# Altium PCB cangps_micro.PcbDoc
Units mm, origin at the board's own origin, x right, y up, seen from the top; angles counter-clockwise.
Board outline 13 x 33.5 mm, 2 copper layers (Top Layer, Bottom Layer); 21 components, 23 nets, 114 pads, 65 vias.
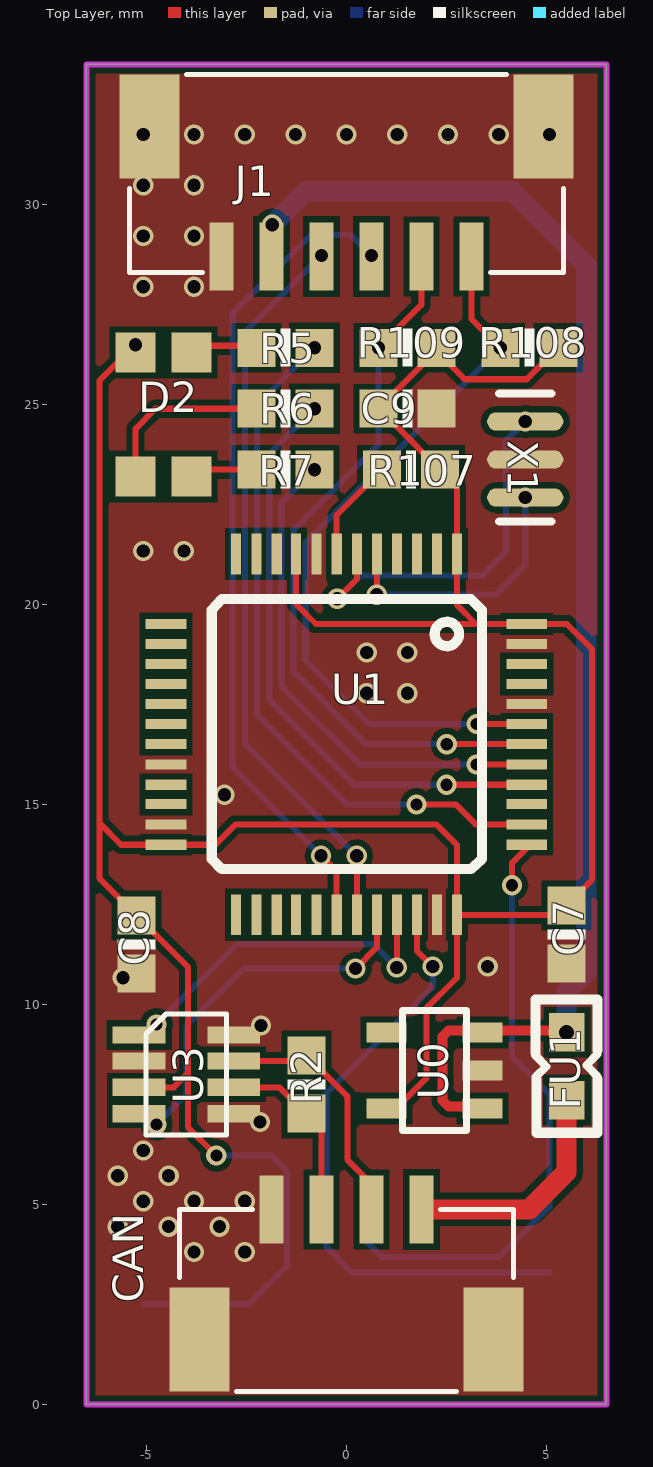
[diagram p0: Top Layer view]
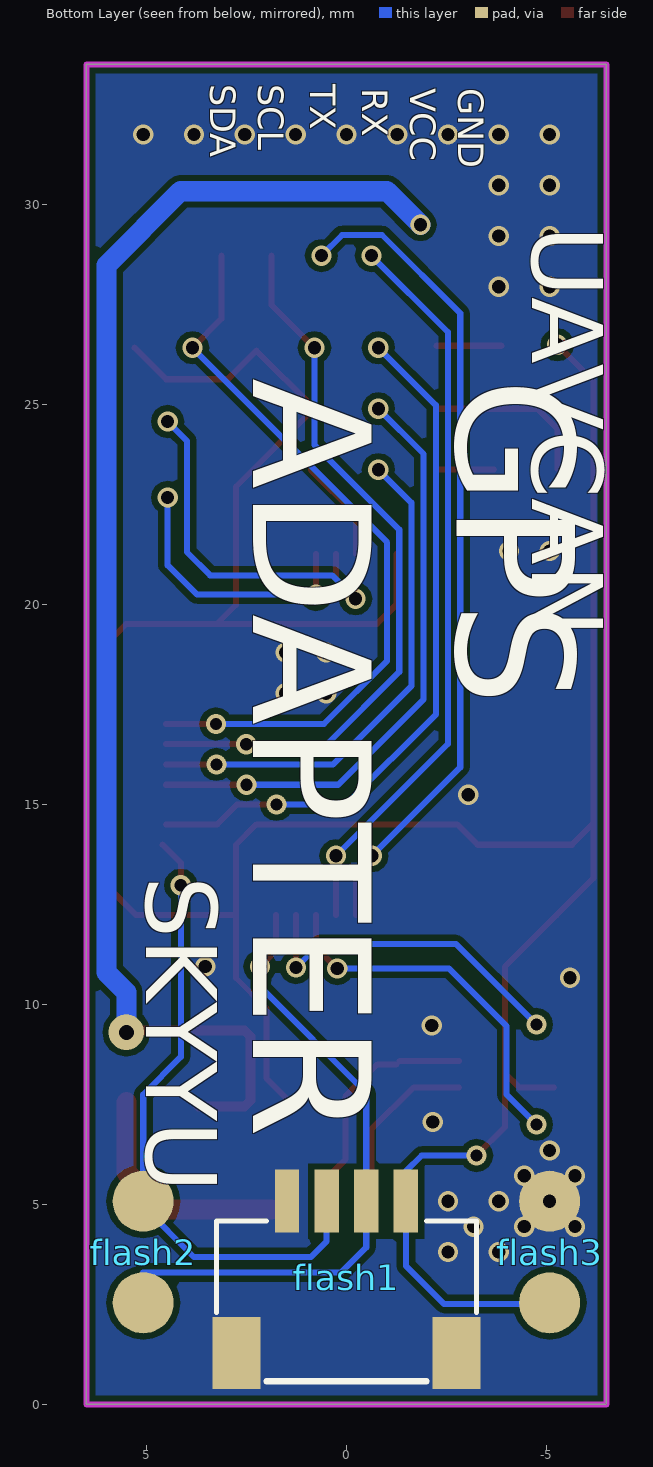
[diagram p1: Bottom Layer view, seen from below]
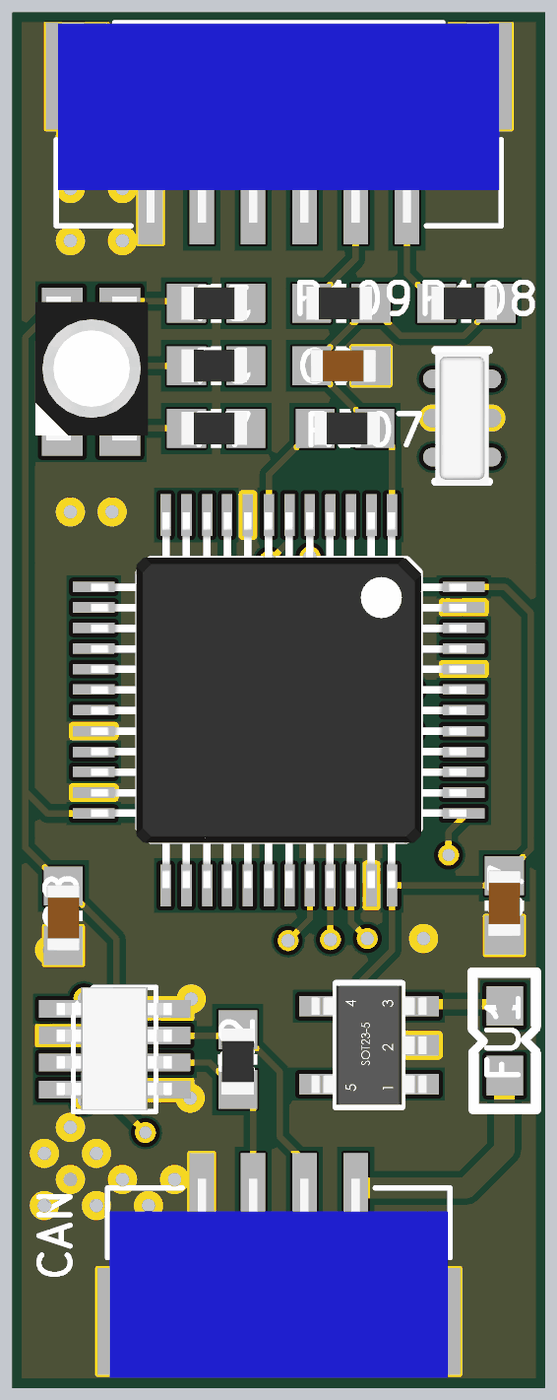
[diagram p2: 3D render of the assembled board from above, using the file's embedded part models]

## Layer stack, top to bottom
Top Solder: solder mask 0.0102, Solder Resist, Dk 3.5
Top Layer: signal copper 0.0356
Dielectric 1: dielectric 0.32, FR-4, Dk 4.8
Bottom Layer: signal copper 0.0356
Bottom Solder: solder mask 0.0102, Solder Resist, Dk 3.5

## Board outline
-6.5,0 6.5,0 6.5,33.5 -6.5,33.5

## Design rules (kind name [scope] priority, off if disabled: settings)
Clearance [All] p1: gap=0.152
ComponentClearance [All] p1 off: gap=0.254 collisioncheckmode=3 verticalgap=0.254 showdistances=FALSE
PolygonConnect [All] p1: connectstyle=Direct reliefconductorwidth=0.065 reliefentries=4 polygonreliefangle="90 Angle" airgapwidth=0
RoutingVias [All] p1: holewidth=0.711 width=1.27 viastyle="Through Hole" minholewidth=0.711 minwidth=1.27 maxholewidth=0.711 maxwidth=1.27
SolderMaskExpansion [All] p1: expansion=0.102
Width [All] p1: maxlimit=0.762 minlimit=0.152 preferedwidth=0.254
29 further rules are at their usual default settings.

## Components (designator, comment, footprint, x,y, rotation, side; value= is the part's Value field where it differs from the comment)
C7 "0.1uF" C0603 5.5,11.75 r90 top
C8 "0.1uF" C0603 -5.25,11.5 r270 top
C9 "0.1uF" C0603 1.524,24.892 r0 top
CAN "J-GH1.25-04P" SM04B-GHS-TB 0,3.75 r180 top
D2 "RGB_3528" RGB_3528 -4.575,24.7 r270 top
flash1 "J-SH1.0-04P" SM04B-SRSS-TB 0,5.08 r0 bottom
flash2 "PAD2" PAD2_2.54 5.08,3.81 r270 bottom
flash3 "PAD2" PAD2_2.54 -5.08,3.81 r270 bottom
FU1 "500MA" L0603 5.512,8.458 r270 top
J1 "J-GH1.25-06P" SM06B-GHS-TB 0,29.825 r0 top
R2 "120" R0603 -1,8 r270 top
R5 "10k" R0603 -1.524,26.416 r180 top
R6 "10k" R0603 -1.524,24.892 r180 top
R7 "10k" R0603 -1.524,23.368 r180 top
R107 "10K" R0603 1.614,23.368 r0 top
R108 "10K" R0603 4.572,26.416 r180 top
R109 "10K" R0603 1.524,26.416 r180 top
U0 "MIC5205" SOT23-5 2.2,8.35 r180 top
U1 "STM32F103C8Tx" LQFP48 0,16.75 r270 top
U3 "MAX3051" SOT23-8 -4,8.25 r0 top
X1 "CSTCE8M" XTAL-CSTCE 4.47,23.622 r90 top

## Footprints (in the part's own frame and the unit in brackets; to place one, negate y for a bottom-side part, rotate by r counter-clockwise, add the part's x,y. Pads: shape width x height; smd on the part's side, far side on the other; paste and mask are expansions set on the pad)
C0603 [mm]
  rect 0.95x0.95 smd mask+0.051: 1(-0.725,0) 2(0.725,0)
  silkscreen extent -0.13,-0.48 0.13,0.47, body extent -0.75,-0.4 0.85,0.4, height 0.6
L0603 [mil]
  rect 38x35 smd: 1(-33.44,0) 2(33.44,0)
  silkscreen extent -65,-31 66,30, body extent -29,-15 31,15, height 20
LQFP48 [mil]
  rect 40x10 smd: 1(-177.58,108.68) 2(-177.58,89) 3(-177.58,69.31) 4(-177.58,49.63) 5(-177.58,29.94) 6(-177.58,10.26) 7(-177.58,-9.58) 8(-177.58,-29.58) 9(-177.58,-49.58) 10(-177.58,-68.58) 11(-177.58,-88.58) 12(-177.58,-108.58) 25(177.58,-108.58) 26(177.58,-88.58) 27(177.58,-68.58) 28(177.58,-49.58) 29(177.58,-29.58) 30(177.58,-9.58) 31(177.58,10.26) 32(177.58,29.94) 33(177.58,49.63) 34(177.58,69.31) 35(177.58,89) 36(177.58,108.68)
  rect 10x40 smd: 13(-108.68,-177.58) 14(-89,-177.58) 15(-69.31,-177.58) 16(-49.63,-177.58) 17(-29.94,-177.58) 18(-10.26,-177.58) 19(9.58,-177.58) 20(29.58,-177.58) 21(49.58,-177.58) 22(68.58,-177.58) 23(88.58,-177.58) 24(108.58,-177.58) 37(108.58,177.58) 38(88.58,177.58) 39(68.58,177.58) 40(49.58,177.58) 41(29.58,177.58) 42(9.58,177.58) 43(-10.26,177.58) 44(-29.94,177.58) 45(-49.63,177.58) 46(-69.31,177.58) 47(-89,177.58) 48(-108.68,177.58)
  silkscreen extent -133,-133 133,133, body extent -180,-180 180,180, height 64
PAD2_2.54 [mil]
  round 60 smd: 1(50,0) 2(-50,0)
R0603 [mm]
  rect 0.95x0.95 smd mask+0.051: 1(-0.725,0) 2(0.725,0)
  silkscreen extent -0.13,-0.48 0.13,0.47, body extent -0.75,-0.4 0.85,0.4, height 0.4
RGB_3528 [mm]
  rect 1x1 smd: 1(-1.6,-0.7) 2(-1.6,0.7) 3(1.5,0.7) 4(1.5,-0.7)
  body extent -1.88,-1.36 1.62,1.39, height 1.95
SM04B-GHS-TB [mm]
  rect 0.6x1.7 smd mask+0.051: 1(-1.875,-1.125) 2(-0.625,-1.125) 3(0.625,-1.125) 4(1.875,-1.125)
  rect 1.5x2.6 smd mask+0.051: GND(-3.675,2.125) GND(3.675,2.125)
  silkscreen extent -4.18,-1.12 4.17,3.43, body extent -4.13,-1.35 4.13,3.5, height 4.25
SM04B-SRSS-TB [mil]
  rect 24x62 smd mask+2: 1(-58.5,0) 2(-19.5,0) 3(19.5,0) 4(58.5,0)
  rect 47.24x70.87 smd mask+2: GND(-108.27,149.61) GND(108.27,149.61)
  silkscreen extent -128,19 128,177, body extent -118,-18 118,177, height 116
SM06B-GHS-TB [mm]
  rect 0.6x1.7 smd mask+0.051: 1(-3.125,-1.125) 2(-1.875,-1.125) 3(-0.625,-1.125) 4(0.625,-1.125) 5(1.875,-1.125) 6(3.125,-1.125)
  rect 1.5x2.6 smd mask+0.051: GND(-4.925,2.125) GND(4.925,2.125)
  silkscreen extent -5.43,-1.52 5.43,3.43, body extent -5.38,-1.45 5.38,3.4, height 4.25
SOT23-5 [mm]
  rect 1x0.5 smd: 1(-1.2,0.95) 2(-1.2,0) 3(-1.2,-0.95) 4(1.2,-0.95) 5(1.2,0.95)
  silkscreen extent -0.8,-1.5 0.8,1.5, body extent -1.4,-1.45 1.4,1.45, height 1.09
SOT23-8 [mil]
  rect 52x17 smd: 1(-46.63,38.69) 2(-46.63,13.1) 3(-46.63,-12.69) 4(-46.63,-38.69) 5(46.63,-38.69) 6(46.63,-12.69) 7(46.63,13.1) 8(46.63,38.69)
  silkscreen extent -40,-60 40,59, body extent -56,-59 55,59, height 44
XTAL-CSTCE [mil]
  rrect100% 18x75 smd: 1(-37.4,0) 2(0,0) 3(37.4,0)
  silkscreen extent -61,-26 65,26, body extent -63,-26 63,26, height 40

## Part data
C7 C8 C9: library part Capacitor
FU1: library part FU
R2 R5 R6 R7 R107 R108 R109: library part Resistor

## Via types
v1: diameter 0.508, hole 0.33, Top Layer to Bottom Layer, 55 vias
v2: diameter 0.508, hole 0.305, Top Layer to Bottom Layer, 9 vias
v3: diameter 0.889, hole 0.381, Top Layer to Bottom Layer, 1 vias

## Nets (pads, with @x,y where several pads share a name; then routed paths per layer and width w, separated by ;. In a path a pad name is that pad's centre, name@x,y a point inside that pad or via, vN(x,y) a via of type N, cw(c..) or ccw(c..) an arc to the next point about the centre after c; other vN are vias at no path point)
3.3V: C7.2 C8.1 C9.1 D2.1 flash1.1 flash3.1 R107.2 R108.1 R109.1 U0.5 U1.1 U1.9 U1.24 U1.36 U1.48 U3.3 | length 78.9
  Top Layer w0.152: -6.172,14.529 -5.635,13.992 -3.28,13.992 -2.772,14.5 2.25,14.5 2.761,13.989 2.761,10.661 2,9.9 2,8.15 U0.5@1.3,7.45 ; v1(-5.272,26.492) -6.176,25.588 -6.176,13.151 C8.1 -3.962,10.937 -3.962,6.934 v2(-3.251,6.223) ; U3.3 -4.315,7.928 -3.962,8.28 ; U1.9 -1.259,20.009 -0.761,19.511 3.239,19.511 ; U1.36 5.264,12.239 C7.2 6.143,13.118 6.143,18.876 5.508,19.511 3.239,19.511 ; R108.1 4.51,25.629 2.962,25.629 2.249,26.342 0.807,24.9 2.761,22.946 2.761,19.989 3.239,19.511
  Bottom Layer w0.152: flash3.1@-5.055,2.515 -2.438,2.515 -1.486,3.467 -1.486,5.829 -1.88,6.223 v2(-3.251,6.223)
CANH: CAN.2 R2.1 U3.7 | length 5.9
  Top Layer w0.152: U3.7 R2.1@-1.333,8.583 ; R2.1@-1.25,8.5 -0.775,8.5 0.025,7.7 0.025,6.121 0.625,5.522 CAN.2@0.625,5.125
CANL: CAN.3 R2.2 U3.6 | length 4.6
  Top Layer w0.152: U3.6 -1.678,7.928 -0.625,6.875 CAN.3
GND: C7.1 C8.2 C9.2 CAN.4 CAN.GND flash1.4 flash1.GND flash3.2 J1.1 J1.GND U0.2 U1.8 U1.20 U1.23 U1.35 U1.44 U1.47 U3.2 U3.5 U3.8 X1.2
  other v1: -3.81,3.81 -2.54,3.81 -5.715,4.445 -4.445,4.445 -3.175,4.445 -5.08,5.08 -3.81,5.08 -2.54,5.08 -5.715,5.715 -4.445,5.715 -5.08,6.35 -2.159,7.061 -2.134,9.474 -5.588,10.668 3.531,10.947 -3.048,15.24 0.508,17.78 1.524,17.78 0.508,18.796 1.524,18.796 -5.08,21.336 -4.064,21.336 -5.08,27.94 -3.81,27.94 -5.08,29.21 -3.81,29.21 -5.08,30.48 -3.81,30.48 -5.08,31.75 -3.81,31.75 -2.54,31.75 -1.27,31.75 0,31.75 1.27,31.75 2.54,31.75 3.81,31.75 5.08,31.75
NetCAN_1: CAN.1 FU1.2 | length 5.8
  Top Layer w0.508: CAN.1 4.57,4.875 5.5,5.805 FU1.2@5.5,7.551
NetD2_2: D2.2 R5.2 | length 1.6
  Top Layer w0.152: D2.2@-3.872,26.467 R5.2@-2.249,26.467
NetD2_3: D2.3 R7.2 | length 1.4
  Top Layer w0.152: D2.3@-3.693,23.368 R7.2
NetD2_4: D2.4 R6.2 | length 4.2
  Top Layer w0.152: D2.4@-5.272,23.392 -5.272,24.395 -4.775,24.892 R6.2
Netflash1_2: flash1.2 flash2.1 U1.34 | length 15.4
  Top Layer w0.152: U1.34 1.761,11.346 v1(2.159,10.947)
  Bottom Layer w0.152: v1(2.159,10.947) 2.159,10.439 -0.495,7.785 -0.495,3.924 0.127,3.302 5.08,3.302
Netflash1_3: flash1.3 flash2.2 U1.37 | length 15.9
  Top Layer w0.152: v2(4.14,12.979) 4.14,13.538 U1.37@4.594,13.992
  Bottom Layer w0.152: flash1.3 0.495,4.077 0.889,3.683 3.81,3.683 5.08,4.953 5.08,5.842 5.08,7.747 4.14,8.687 v2(4.14,12.979)
NetJ1_3: J1.3 U1.31 | length 18.4
  Top Layer w0.152: U1.31 v1(0.261,13.716)
  Bottom Layer w0.152: v1(-0.625,28.72) -2.54,26.805 -2.54,16.517 v1(0.261,13.716)
NetJ1_4: J1.4 U1.30 | length 20.6
  Top Layer w0.152: v1(-0.635,13.716) -0.243,13.324 U1.30
  Bottom Layer w0.152: v1(-0.635,13.716) -2.845,15.926 -2.845,27.28 -0.889,29.235 0.11,29.235 v1(0.625,28.72)
NetJ1_5: J1.5 R109.2 U1.42 | length 18.3
  Top Layer w0.152: v1(0.799,26.416) 1.875,27.492 J1.5@1.875,28.72 ; v2(2.507,16.507) U1.42
  Bottom Layer w0.152: v1(0.799,26.416) 0.799,23.989 -1.321,21.869 -1.321,18.313 0.486,16.507 v2(2.507,16.507)
NetJ1_6: J1.6 R108.2 U1.43 | length 18.7
  Top Layer w0.152: J1.6@3.125,28.72 3.125,27.138 v1(3.847,26.416) ; v2(3.261,17.011) U1.43
  Bottom Layer w0.152: v2(3.261,17.011) 0.566,17.011 -1.016,18.593 -1.016,21.553 3.726,26.295 v1@3.968,26.295
NetR5_1: R5.1 U1.38 | length 17.6
  Top Layer w0.152: v2(1.75,15) 2.729,15 3.229,14.5 U1.38
  Bottom Layer w0.152: v1(-0.799,26.416) -2.235,24.98 -2.235,17.247 0.011,15 v2(1.75,15)
NetR6_1: R6.1 U1.40 | length 15.1
  Top Layer w0.152: v2(2.5,15.491) U1.40
  Bottom Layer w0.152: v1(-0.799,24.892) -1.93,23.761 -1.93,17.628 0.207,15.491 v2(2.5,15.491)
NetR7_1: R7.1 U1.41 | length 12.7
  Top Layer w0.152: v2@3.25,15.999 U1.41
  Bottom Layer w0.152: v1(-0.799,23.368) -1.626,22.541 -1.626,17.958 0.332,16 v2(3.25,16)
NetR107_1: R107.1 U1.7 | length 2.6
  Top Layer w0.152: U1.7 -0.243,22.236 R107.1
NetU1_5: U1.5 X1.1 | length 6.7
  Top Layer w0.152: v1(0.761,20.244) U1.5
  Bottom Layer w0.152: v1(0.761,20.244) 3.734,20.244 4.47,20.98 v1(4.47,22.672)
NetU1_6: U1.6 X1.3 | length 9.5
  Top Layer w0.152: v1(-0.229,20.142) 0.261,20.631 U1.6
  Bottom Layer w0.152: v1(-0.229,20.142) 0.356,20.726 3.404,20.726 3.988,21.311 3.988,24.089 v1(4.47,24.572)
NetU1_32: U1.32 U3.4 | length 9.2
  Top Layer w0.152: v1(0.229,10.897) 0.761,11.429 U1.32
  Bottom Layer w0.152: v2(-4.75,7) -4,7.75 -4,9.462 -2.565,10.897 v1(0.229,10.897)
NetU1_33: U1.33 U3.1 | length 8.4
  Top Layer w0.152: v1(1.261,10.922) U1.33
  Bottom Layer w0.152: v2(-4.75,9.5) -2.744,11.506 0.676,11.506 v1(1.261,10.922)
VIN: FU1.1 J1.2 U0.1 U0.3 | length 34.5
  Top Layer w0.254: U0.1@3.7,7.45 2.55,7.45 2.4,7.6 2.4,9.2 2.55,9.35 5.399,9.35 FU1.1@5.5,9.249
  Bottom Layer w0.508: v1(-1.854,29.489) -1.016,30.328 4.149,30.328 5.996,28.481 5.996,10.797 5.5,10.301 v3(5.5,9.3)
pads on no net: U0.4 U1.2 U1.3 U1.4 U1.10 U1.11 U1.12 U1.13 U1.14 U1.15 U1.16 U1.17 U1.18 U1.19 U1.21 U1.22 U1.25 U1.26 U1.27 U1.28 U1.29 U1.39 U1.45 U1.46

## Polygon pours and split planes (outlines as drawn)
GND on Bottom Layer "Bottom Layer-No Net" (solid, remove dead copper, pour order 12): -7,34 7,34 7,0 -7,0
GND on Top Layer "Bottom Layer-No Net" (solid, remove dead copper, pour order 14): -7,0 -7,34 7,34 7,0

## Keep-outs
Keep-Out Layer:
  the board outline again, w0.152

## Silkscreen, mask and mechanical layers (free items; w line width, h text height)
Bottom Overlay:
  text "TX" at 0.9,33 h0.64 r90
  text "SCL" at 2.2,33 h0.64 r90
  text "SDA" at 3.4,33 h0.64 r90
  text "GND" at -2.8,32.9 h0.64 r90
  text "VCC" at -1.6,32.9 h0.64 r90
  text "RX" at -0.4,32.9 h0.64 r90
  text "UAVCAN" at -4.064,29.464 h3.05 r90
  text "GPS  / ADAPTER" at 3.302,25.654 h5.08 r90
  text "SKYYU" at 5.588,13.208 h3.05 r90